# Altium PCB PCB1.PcbDoc (part 1 of 2)
Units mm, origin at the board's own origin, x right, y up, seen from the top; angles counter-clockwise.
Board outline 60.46 x 18.59 mm, 2 copper layers (Top Layer, Bottom Layer), stack 0.325 mm thick; 73 components, 89 nets, 327 pads, 208 vias.
Unrouted connection lines stored in the file: 2.
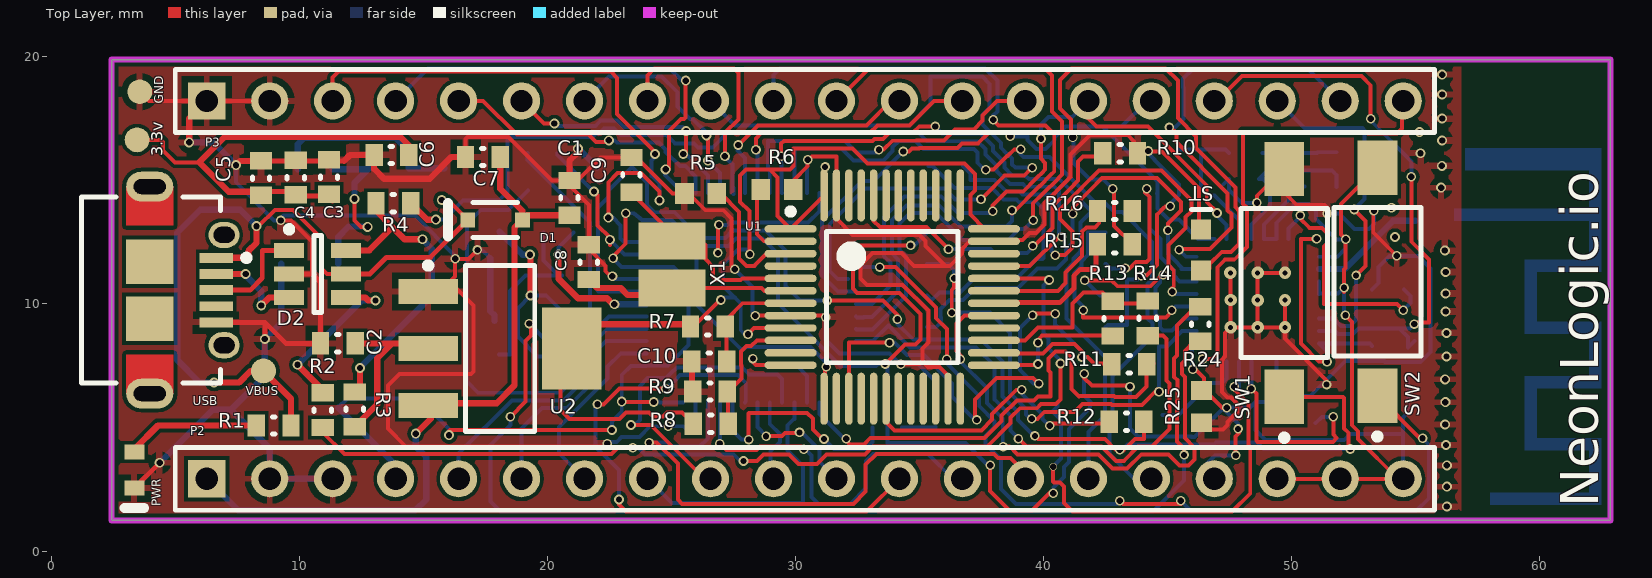
[diagram p0: Top Layer view]
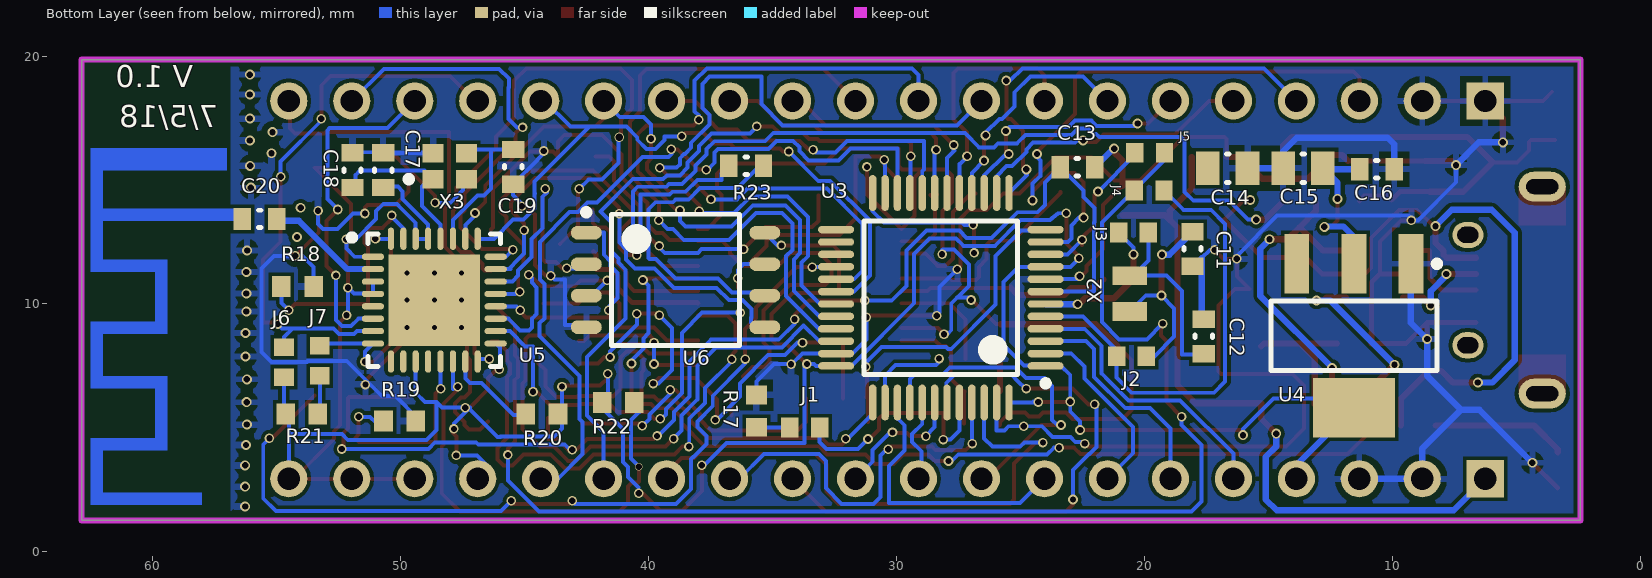
[diagram p1: Bottom Layer view, seen from below]

## Layer stack, top to bottom
Top Solder: solder mask 0.0102, Solder Resist, Dk 3.5
Top Layer: signal copper 0.0356
Dielectric 1: core 0.254, FR-4, Dk 4.2
Bottom Layer: signal copper 0.0356
Bottom Solder: solder mask 0.0102, Solder Resist, Dk 3.5

## Board outline
2.413,1.27 62.87,1.27 62.87,19.86 2.413,19.86

## Design rules (kind name [scope] priority, off if disabled: settings)
Clearance [All] p1: gap=0.152 ignorepadtopadclearanceinfootprint=FALSE
HoleSize [All] p1: absolutevalues=TRUE maxlimit=2.54 minlimit=0.254 maxpercent=80.000 minpercent=20.000
MinimumSolderMaskSliver MinimumSolderMaskSliver_2 [HasFootprint('ESFS-QFN-32_M')] p1: minsoldermaskwidth=0.046
MinimumSolderMaskSliver [HasFootprint('MOLX-47589-0001_V') vs HasFootprint('MOLX-47589-0001_V')] p2: minsoldermaskwidth=0.04
MinimumSolderMaskSliver MinimumSolderMaskSliver_1 [All] p3: minsoldermaskwidth=0.076
PolygonConnect [All] p1: connectstyle=Relief reliefconductorwidth=0.254 reliefentries=4 polygonreliefangle="90 Angle" airgapwidth=0.254
RoomDefinition WiFi [InComponentClass('WiFi')] p1: confinementstyle=ConfineIn formatcopy=TRUE lockcomponents=FALSE outline 0,19.86 62.87,19.86 62.87,1.27 0,1.27
RoomDefinition U_STLINK-V2 [InComponentClass('U_STLINK-V2')] p2: confinementstyle=ConfineIn formatcopy=TRUE lockcomponents=FALSE outline 0,19.86 62.87,19.86 62.87,1.27 0,1.27
RoomDefinition U_MCU [InComponentClass('U_MCU')] p3: confinementstyle=ConfineIn formatcopy=TRUE lockcomponents=FALSE outline 0,19.86 62.87,19.86 62.87,1.27 0,1.27
RoutingVias [All] p1: holewidth=0.254 width=0.4 viastyle="Through Hole" minholewidth=0.254 minwidth=0.385 maxholewidth=0.7 maxwidth=0.9
SilkToSilkClearance [All] p1: silktosilkclearance=0.2
SilkToSolderMaskClearance [IsPad] p1: minsilkscreentomaskgap=0.17 clearancetoexposedcopper=TRUE
SolderMaskExpansion [All] p1: expansion=0.102
UnRoutedNet [InNet('No Net')] p1:
Width [All] p1: maxlimit=0.8 minlimit=0.16 preferedwidth=0.2 minimp=50.000000 maximp=50.000000 favimp=50.000000
25 further rules are at their usual default settings.

## Classes and differential pairs
component class WiFi: C17 C18 C19 C20 J6 J7 R18 R19 R20 R21 R22 R23 U5 U6 X3
component class U_STLINK-V2: 3.3v C1 C2 C3 C4 C5 C6 C7 C8 C9 C10 D1 D2 GND PWR R1 R2 R3 R4 R5 R6 R7 R8 R9 R10 R11 R12 R13 R14 R15 R16 R24 ST U1 U2 USB VBUS X1
component class U_MCU: C11 C12 C13 C14 C15 C16 J1 J2 J3 J4 J5 P2 P3 R17 R25 SW1 SW2 U4 X2

## Components (designator, comment, footprint, x,y, rotation, side; value= is the part's Value field where it differs from the comment)
3.3v "" TP-SM-C-100 3.44,16.62 r0 top
C1 "1uF 16V" CAPC0603(1608)100_L 20.88,14.28 r270 top value=1uF
C2 "1uF 16V" CAPC0603(1608)100_L 11.54,8.41 r0 top value=1uF
C3 "100nF" CAPC0603(1608)100_L 11.18,15.12 r270 top
C4 "100nF" CAPC0603(1608)100_L 9.84,15.1 r270 top
C5 "100nF" CAPC0603(1608)100_L 8.44,15.08 r270 top
C6 "100nF" CAPC0603(1608)100_L 13.7,16.01 r0 top
C7 "100nF" CAPC0603(1608)100_L 17.39,15.93 r0 top
C8 "22pF" CAPC0603(1608)100_L 21.66,11.69 r270 top
C9 "22pF" CAPC0603(1608)100_L 23.38,15.21 r270 top
C10 "100nF" CAPC0603(1608)100_L 26.52,7.68 r0 top
C11 "4.3pF" CAPC0603(1608)100_L 18.06,12.22 r90 bottom
C12 "4.3pF" CAPC0603(1608)100_L 17.6,8.69 r270 bottom
C13 "100nF" CAPC0603(1608)100_L 22.7,15.52 r0 bottom
C14 "10uF 25v" CAPC0805(2012)145_L 16.64,15.48 r0 bottom value=10uF
C15 "10uF 10v" CAPC0805(2012)145_L 13.6,15.48 r180 bottom value=10uF
C16 "100nF" CAPC0603(1608)100_L 10.62,15.44 r0 bottom
C17 "100nF" CAPC0603(1608)100_L 50.7,15.4 r270 bottom
C18 "10pF" CAPC0603(1608)100_L 51.94,15.4 r270 bottom
C19 "10pF" CAPC0603(1608)100_L 45.46,15.53 r90 bottom
C20 "5.6 pf" CAPC0603(1608)100_L 55.69,13.43 r0 bottom value=5.6pF
D1 "PMEG2010 SOD323F" NXP-SOD323F_V 17.88,13.39 r180 top
D2 "USBLC6-2SC6" STM-SOT23-6L_V 10.72,11.21 r0 top
GND "" TP-SM-C-100 3.55,18.56 r0 top
J1 "" RESC1608X55X30LL10T20_A 33.7,5.02 r0 bottom
J2 "" RESC1608X55X30LL10T20_A 20.52,7.89 r0 bottom
J3 "" RESC1608X55X30LL10T20_A 20.44,12.88 r0 bottom
J4 "" RESC1608X55X30LL10T20_A 19.81,14.58 r180 bottom
J5 "" RESC1608X55X30LL10T20_A 19.79,16.1 r0 bottom
J6 "" RESC1608X55X30LL10T20_A 54.71,7.65 r90 bottom
J7 "" RESC1608X55X30LL10T20_A 53.26,7.71 r270 bottom
P2 "Header 20" HDR1X20 6.25,2.95 r0 top locked
P3 "Header 20" HDR1X20 6.25,18.19 r0 top locked
PWR "TLMS1100-GS08" VISH-TLMX1100_V 3.33,3.3 r270 top
R1 "220R 1% 0603(1608)" RESC0603(1608)_L 8.95,5.1 r180 top value="220.00 Ohm"
R2 "22R 1% 0603(1608)" RESC0603(1608)_L 10.93,5.72 r270 top value="22.00 Ohm"
R3 "1K5 1% 0603(1608)" RESC0603(1608)_L 12.22,5.75 r270 top value="1500.00 Ohm"
R4 "22R 1% 0603(1608)" RESC0603(1608)_L 13.78,14.06 r0 top value="22.00 Ohm"
R5 "10K" RESC1609X55X30LL15T15 26.17,14.45 r0 top
R6 "10K" RESC1609X55X30LL15T15 29.25,14.62 r180 top
R7 "100K" RESC0603(1608)_L 26.46,9.09 r0 top value="100000.00 Ohm"
R8 "4K7" RESC0603(1608)_L 26.58,5.17 r0 top value="4700.00 Ohm"
R9 "4K7" RESC0603(1608)_L 26.55,6.47 r180 top value="4700.00 Ohm"
R10 "100K" RESC0603(1608)_L 43.09,16.08 r180 top value="100000.00 Ohm"
R11 "22R" RESC0603(1608)_L 43.46,7.57 r180 top value="22.00 Ohm"
R12 "22R" RESC0603(1608)_L 43.35,5.25 r0 top value="22.00 Ohm"
R13 "100R" RESC0603(1608)_L 42.79,9.41 r90 top value="100.00 Ohm"
R14 "22R" RESC0603(1608)_L 44.203,9.422 r270 top value="22.00 Ohm"
R15 "100K" RESC0603(1608)_L 42.88,12.41 r180 top value="100000.00 Ohm"
R16 "22R" RESC0603(1608)_L 42.88,13.75 r180 top value="22.00 Ohm"
R17 "10K" RESC1609X55X30LL15T15 35.65,5.68 r90 bottom
R18 "12K" RESC1609X55X30LL15T15 54.16,10.71 r0 bottom
R19 "12K" RESC1609X55X30LL15T15 50.04,5.28 r0 bottom
R20 "12K" RESC1609X55X30LL15T15 44.3,5.56 r0 bottom
R21 "12K" RESC1609X55X30LL15T15 53.99,5.56 r0 bottom
R22 "12K" RESC1609X55X30LL15T15 41.22,6.02 r180 bottom
R23 "200R" RESC0603(1608)_L 36.06,15.57 r0 bottom value="200.00 Ohm"
R24 "100R" RESC0603(1608)_L 46.33,9.19 r270 top value="100.00 Ohm"
R25 "10K" RESC1609X55X30LL15T15 46.37,5.86 r90 top
ST "" ROHM-SMLE12BC7TT86_V 46.36,12.18 r90 top
SW1 "FSMSMTR" TECO-FSMSMTR_V 49.71,10.85 r90 top
SW2 "FSMSMTR" TECO-FSMSMTR_V 53.47,10.9 r90 top
U1 "STM32F103C8T6" LQFP48_M 33.9,10.28 r0 top
U2 "LD1117S33CTR" SOT-223_N 18.08,8.2 r0 top
U3 "STM32F070CBT6" STM-LQFP48_N 28.21,10.25 r0 bottom
U4 "LD1117S33CTR" SOT-223_N 11.55,8.72 r270 bottom
U5 "ESP8266EX" ESFS-QFN-32_M 48.64,10.155 r180 bottom
U6 "S25FL116K0XMFI011" CYP-SOC-8_L 38.91,10.97 r180 bottom
USB "47589-0001" MOLX-47589-0001_V 5.45,10.56 r270 top locked
VBUS "" TP-SM-C-100 8.54,7.3 r90 top
X1 "8MHZ" NDK-NX3225GD-8MHZ-STD-CRA-3_V 25.01,11.59 r90 top
X2 "ABS06-32.768KHZ-T" ABRA-ABS06-2_V 20.59,10.42 r90 bottom
X3 "26MHZ" NDK-NX2016SA-26MHZ-EXS00A-CS06025-4_V 48.02,15.56 r180 bottom

## Footprints (in the part's own frame and the unit in brackets; to place one, negate y for a bottom-side part, rotate by r counter-clockwise, add the part's x,y. Pads: shape width x height; smd on the part's side, far side on the other; paste and mask are expansions set on the pad)
ABRA-ABS06-2_V [mm] "SMD, 2-Leads, Body 2x1.2mm"
  rect 0.75x1.4 smd: 1(-0.725,0) 2(0.725,0)
  body extent -1,-0.6 1,0.6, height 0.6
CAPC0603(1608)100_L [mm] "Chip Capacitor, Body 1.6x0.8mm, Height 1.0mm, IPC High Density"
  rect 0.7x0.9 smd: 1(-0.7,0) 2(0.7,0)
  silkscreen extent -0.05,-0.35 0.05,0.35, body extent -0.87,-0.47 0.88,0.48, height 1
CAPC0805(2012)145_L [mm] "Chip Capacitor, Body 2.0x1.2mm, Height 1.45mm, IPC High Density"
  rect 0.95x1.35 smd: 1(-0.8,0) 2(0.8,0)
  silkscreen extent -0.05,-0.57 0.05,0.57, body extent -1.1,-0.72 1.1,0.72, height 1.45
CYP-SOC-8_L [mm] "SOIC, 8-Leads, Body 5.3x5.3mm, Pitch 1.27mm, IPC High Density"
  oval 1.25x0.55 smd: 1(-3.6,1.905) 2(-3.6,0.635) 3(-3.6,-0.635) 4(-3.6,-1.905) 5(3.6,-1.905) 6(3.6,-0.635) 7(3.6,0.635) 8(3.6,1.905)
  silkscreen extent -3.73,-2.65 2.57,2.85, body extent -4,-2.65 4,2.65, height 2.16
ESFS-QFN-32_M [mm] "QFN, 32-Leads, Body 5.05x5.05mm, Pitch 0.50mm, Thermal Pad 3.70x3.70mm, IPC Low Density"
  oval 0.9x0.25 smd: 1(-2.475,1.75) 2(-2.475,1.25) 3(-2.475,0.75) 4(-2.475,0.25) 5(-2.475,-0.25) 6(-2.475,-0.75) 7(-2.475,-1.25) 8(-2.475,-1.75) 17(2.475,-1.75) 18(2.475,-1.25) 19(2.475,-0.75) 20(2.475,-0.25) 21(2.475,0.25) 22(2.475,0.75) 23(2.475,1.25) 24(2.475,1.75)
  oval 0.25x0.9 smd: 9(-1.75,-2.475) 10(-1.25,-2.475) 11(-0.75,-2.475) 12(-0.25,-2.475) 13(0.25,-2.475) 14(0.75,-2.475) 15(1.25,-2.475) 16(1.75,-2.475) 25(1.75,2.475) 26(1.25,2.475) 27(0.75,2.475) 28(0.25,2.475) 29(-0.25,2.475) 30(-0.75,2.475) 31(-1.25,2.475) 32(-1.75,2.475)
  rect 3.7x3.7 smd: 33(0,0)
  silkscreen extent -3.45,-2.68 2.67,2.67, body extent -2.52,-2.52 2.53,2.53, height 0.9
HDR1X20 [mm] "Connector; Header; 20 Position"
  rect 1.5x1.5 hole 0.9: 1(0,0)
  round 1.5 hole 0.9: 2(2.54,0) 3(5.08,0) 4(7.62,0) 5(10.16,0) 6(12.7,0) 7(15.24,0) 8(17.78,0) 9(20.32,0) 10(22.86,0) 11(25.4,0) 12(27.94,0) 13(30.48,0) 14(33.02,0) 15(35.56,0) 16(38.1,0) 17(40.64,0) 18(43.18,0) 19(45.72,0) 20(48.26,0)
  silkscreen extent -1.27,-1.27 49.53,1.27
LQFP48_M [mm] "Thin QFP, 48-Leads, Body 7x7mm, Pitch 0.5mm, IPC Low Density"
  oval 2.1x0.3 smd: 1(-4.1,2.75) 2(-4.1,2.25) 3(-4.1,1.75) 4(-4.1,1.25) 5(-4.1,0.75) 6(-4.1,0.25) 7(-4.1,-0.25) 8(-4.1,-0.75) 9(-4.1,-1.25) 10(-4.1,-1.75) 11(-4.1,-2.25) 12(-4.1,-2.75) 25(4.1,-2.75) 26(4.1,-2.25) 27(4.1,-1.75) 28(4.1,-1.25) 29(4.1,-0.75) 30(4.1,-0.25) 31(4.1,0.25) 32(4.1,0.75) 33(4.1,1.25) 34(4.1,1.75) 35(4.1,2.25) 36(4.1,2.75)
  oval 0.3x2.1 smd: 13(-2.75,-4.1) 14(-2.25,-4.1) 15(-1.75,-4.1) 16(-1.25,-4.1) 17(-0.75,-4.1) 18(-0.25,-4.1) 19(0.25,-4.1) 20(0.75,-4.1) 21(1.25,-4.1) 22(1.75,-4.1) 23(2.25,-4.1) 24(2.75,-4.1) 37(2.75,4.1) 38(2.25,4.1) 39(1.75,4.1) 40(1.25,4.1) 41(0.75,4.1) 42(0.25,4.1) 43(-0.25,4.1) 44(-0.75,4.1) 45(-1.25,4.1) 46(-1.75,4.1) 47(-2.25,4.1) 48(-2.75,4.1)
  silkscreen extent -4.22,-2.65 2.65,3.57, body extent -3.5,-3.5 3.5,3.5, height 1.6
MOLX-47589-0001_V [mm] "SMD, 5-Leads, Body 7.5x5.6mm, Pitch 0.65mm"
  rect 0.4x1.35 smd: 1(-1.3,1.175) 2(-0.65,1.175) 3(0,1.175) 4(0.65,1.175) 5(1.3,1.175)
  oval 1.05x1.25 hole 0.65 slot 0.85 at 90 deg: 6(-2.225,1.5) 7(2.225,1.5)
  oval 1.2x1.9 hole 0.6 slot 1.3 at 90 deg: 8(-4.175,-1.5) 11(4.175,-1.5)
  rect 1.8x1.9 smd: 9(-1.15,-1.5) 10(1.15,-1.5)
  Top Layer region: -2.6,-0.55 -4.175,-0.55 -4.175,-2.45 -2.6,-2.45
  Top Layer region: 2.6,-2.45 4.175,-2.45 4.175,-0.55 2.6,-0.55
  silkscreen extent -3.75,-4.25 3.75,2.53, body extent -4.32,-4.25 4.32,1.64, height 2.74
NDK-NX2016SA-26MHZ-EXS00A-CS06025-4_V [mm] "Hand Drawn, 4-Leads, Body 2x1.6mm"
  rect 0.85x0.75 smd: 1(-0.675,-0.525) 2(0.675,-0.525) 3(0.675,0.525) 4(-0.675,0.525)
  silkscreen extent -1.78,-0.65 -1.53,-0.4, body extent -1,-0.8 1,0.8, height 0.5
NDK-NX3225GD-8MHZ-STD-CRA-3_V [mm] "SMD, 2-Leads, Body 3.2x2.5mm"
  rect 1.5x2.7 smd: 1(-0.95,0) 2(0.95,0)
  body extent -1.6,-1.25 1.6,1.25, height 1
NXP-SOD323F_V [mm] "SODFL, 2-Leads, Body 1.8x1.35mm"
  rect 0.6x0.6 smd paste-0.05: 1(-1.1,0) 2(1.1,0)
  silkscreen extent -0.9,-0.7 1.9,0.7, body extent -1.25,-0.67 1.25,0.67, height 0.8
RESC0603(1608)_L [mm] "Chip Resistor, Body 1.6x0.8mm, IPC High Density"
  rect 0.7x0.9 smd: 1(-0.7,0) 2(0.7,0)
  silkscreen extent -0.05,-0.35 0.05,0.35, body extent -0.85,-0.47 0.85,0.47, height 0.6
RESC1608X55X30LL10T20_A [mm] "Chip Resistor, 2-Leads, Body 1.7x0.9mm, IPC High Density"
  rect 0.7x0.8 smd: 1(-0.6,0) 2(0.6,0)
  body extent -0.85,-0.45 0.85,0.45, height 0.55
RESC1609X55X30LL15T15 [mm] "Chip Resistor, 2-Leads, Body 1.75x0.95mm, IPC High Density"
  rect 0.75x0.85 smd: 1(-0.65,0) 2(0.65,0)
  body extent -0.87,-0.48 0.87,0.48, height 0.55
ROHM-SMLE12BC7TT86_V [mm] "SMD, 2-Leads, Body 1.6x0.8mm"
  rect 0.8x0.8 smd: 1(-0.825,0) 2(0.825,0)
  silkscreen extent 1.63,-0.4 1.63,0.4, body extent -0.8,-0.4 0.8,0.4, height 0.4
SOT-223_N [mm] "SOT223, 4-Leads, Body 6.5x3.5mm, Pitch 2.3mm, Lead Span 7mm, IPC Medium Density"
  rect 2.4x1 smd: 1(-2.9,2.3) 2(-2.9,0) 3(-2.9,-2.3)
  rect 2.4x3.3 smd: 4(2.9,0)
  silkscreen extent -3.02,-3.35 1.4,3.47, body extent -1.85,-3.35 1.85,3.35, height 1.8
STM-LQFP48_N [mm] "QFP, 48-Leads, Body 7x7mm, Pitch 0.5mm, IPC Medium Density"
  oval 1.45x0.3 smd: 1(-4.225,2.75) 2(-4.225,2.25) 3(-4.225,1.75) 4(-4.225,1.25) 5(-4.225,0.75) 6(-4.225,0.25) 7(-4.225,-0.25) 8(-4.225,-0.75) 9(-4.225,-1.25) 10(-4.225,-1.75) 11(-4.225,-2.25) 12(-4.225,-2.75) 25(4.225,-2.75) 26(4.225,-2.25) 27(4.225,-1.75) 28(4.225,-1.25) 29(4.225,-0.75) 30(4.225,-0.25) 31(4.225,0.25) 32(4.225,0.75) 33(4.225,1.25) 34(4.225,1.75) 35(4.225,2.25) 36(4.225,2.75)
  oval 0.3x1.45 smd: 13(-2.75,-4.225) 14(-2.25,-4.225) 15(-1.75,-4.225) 16(-1.25,-4.225) 17(-0.75,-4.225) 18(-0.25,-4.225) 19(0.25,-4.225) 20(0.75,-4.225) 21(1.25,-4.225) 22(1.75,-4.225) 23(2.25,-4.225) 24(2.75,-4.225) 37(2.75,4.225) 38(2.25,4.225) 39(1.75,4.225) 40(1.25,4.225) 41(0.75,4.225) 42(0.25,4.225) 43(-0.25,4.225) 44(-0.75,4.225) 45(-1.25,4.225) 46(-1.75,4.225) 47(-2.25,4.225) 48(-2.75,4.225)
  silkscreen extent -4.35,-3.1 3.1,3.57, body extent -3.5,-3.5 3.5,3.5, height 1.6
STM-SOT23-6L_V [mm] "SOT23, 6-Leads, Body 3.05x1.75mm, Pitch 0.95mm"
  rect 1.2x0.6 smd: 1(-1.15,0.95) 2(-1.15,0) 3(-1.15,-0.95) 4(1.15,-0.95) 5(1.15,0) 6(1.15,0.95)
  silkscreen extent -1.27,-1.55 0.15,1.92, body extent -1.6,-1.53 1.6,1.53, height 1.45
TECO-FSMSMTR_V [mm] "SMD, 2-Leads, Body 6x3.5mm, Pitch 9.19mm"
  rect 2.2x1.6 smd: 1(-4.595,0)
  rect 2.18x1.6 smd: 2(4.595,0)
  silkscreen extent -6.37,-1.75 3,1.75, body extent -4.98,-1.75 4.98,1.75, height 4.4
TP-SM-C-100 [mm] "Test Point, Surface Mounting, Circular, Pad Diameter 1mm"
  round 1 smd: 1(0,0)
VISH-TLMX1100_V [mm] "SMD, 2-Leads, Body 1.6x0.8mm"
  rect 0.6x0.8 smd: 1(-0.725,0) 2(0.725,0)
  silkscreen extent 1.52,-0.4 1.52,0.4, body extent -0.8,-0.4 0.8,0.4, height 0.65

## Part data
3.3v GND VBUS: library part CMP-0484-00002-2, "Test Point, Surface Mount, Circular, Pad Diameter 1 mm", Manufacturer="No Vendor", PartNumber=TP-SM-C-100
C1 C2: library part CMP-1035-02736-1, "CAP 1uF 16V ±5% 0603 (1608 Metric) Thickness 1mm SMD", Case-EIA=0603, Case-Metric=1608, Rated Voltage="16 V", Tolerance=±5%, Max Thickness="1 mm", Technology=SMT
C3 C4 C5 C6 C7 C10 C13 C16 C17: library part CMP-1035-02583-1, "CAP 100nF 16V ±5% 0603 (1608 Metric) Thickness 1mm SMD", Case-EIA=0603, Case-Metric=1608, Rated Voltage="16 V", Tolerance=±5%, Max Thickness="1 mm", Technology=SMT
C8 C9: library part CMP-1035-00815-1, "CAP 22pF 25V ±10% 0603 (1608 Metric) Thickness 1mm SMD", Case-EIA=0603, Case-Metric=1608, Rated Voltage="25 V", Tolerance=±10%, Max Thickness="1 mm", Technology=SMT
C11 C12: library part CMP-1035-00303-1, "CAP 4.3pF 25V ±0.5pF 0603 (1608 Metric) Thickness 1mm SMD", Case-EIA=0603, Case-Metric=1608, Rated Voltage="25 V", Tolerance=±0.5pF, Max Thickness="1 mm", Technology=SMT
C14: library part CMP-1036-04932-1, "CAP 10uF 25V ±10% 0805 (2012 Metric) Thickness 1.45mm SMD", Case-EIA=0805, Case-Metric=2012, Rated Voltage="25 V", Tolerance=±10%, Max Thickness="1.45 mm", Technology=SMT
C15: library part CMP-1036-04926-1, "CAP 10uF 10V -20% to +80% 0805 (2012 Metric) Thickness 1.45mm SMD", Case-EIA=0805, Case-Metric=2012, Rated Voltage="10 V", Tolerance="-20% to +80%", Max Thickness="1.45 mm", Technology=SMT
C18 C19: library part CMP-1035-00542-1, "CAP 10pF 16V ±1% 0603 (1608 Metric) Thickness 1mm SMD", Case-EIA=0603, Case-Metric=1608, Rated Voltage="16 V", Tolerance=±1%, Max Thickness="1 mm", Technology=SMT
C20: library part CMP-1035-00372-1, "CAP 5.6pF 25V ±0.1pF 0603 (1608 Metric) Thickness 1mm SMD", Case-EIA=0603, Case-Metric=1608, Rated Voltage="25 V", Tolerance=±0.1pF, Max Thickness="1 mm", Technology=SMT
D1: library part CMP-2000-06909-1, "Very Low Forward Voltage MEGA Schottky Barrier Rectifier, 1 A, 660 mV, -65 to 150 degC, 2-Pin SOD323F, RoHS, Tape and Reel", Capacitance @ Vr, F=68pF@1V,1MHz, Current - Average Rectified (Io)=1A(DC), Current - Reverse Leakage @ Vr=50µA@60V, Manufacturer=NXP, Operating Temperature - Junction=150°C(Max), Package / Case=SC-90,SOD-323F, Package Description="2-Pin Small Outline Diode Flat Lead, Body 1.7 x 1.35 mm", Package Reference=SOD323F, Package Version=02/2016, Standard Package=1, Supplier Device Package=SOD-323F, Voltage - DC Reverse (Vr) (Max)=60V, Voltage - Forward (Vf) (Max) @ If=660mV@1A, Category=DiscreteSemiconductorProducts, Datasheet URL=https://datasheet.ciiva.com/913/pmeg6010ceh-pmeg6010cej-913504.pdf, Datasheet Version="Rev. 02, 03/2007", Diode Type=Schottky, Family=Diodes,Rectifiers-Single, Kits=NXPMEGA1-KIT-ND-KITSCHOTTKYDIODE17VALUES, Manufacturer URL=http://www.nxp.com/, Mounting Technology=SurfaceMount, Mounting Type=SurfaceMount, Online Catalog=SchottkyDiode, Other Names=568-4138-1, Package URL=http://www.nxp.com/documents/outline_drawing/SOD323F.pdf, Packaging=CutTape(CT), PCN Design/Specification=ResinHardener02/Jul/2013BondWiringChg06/Sep/2015BondingWireRevision28/Sep/2015SOD323FBondWireAutoCu&2ndSourceMoldComp2/Nov/2015, PCN Packaging=LighterReels02/Jan/2014, Reverse Recovery Time (trr)=-, Series=-, Speed=FastRecovery=200mA(Io)
D2: library part CMP-2000-05378-1, "Very low capacitance ESD protection, 3.5 pF, -40 to 125 degC, 6-Pin SOT23, RoHS, Tape and Reel", Capacitance Value=3.5pF, Clamping Voltage=17V, Leakage Current=0.15uA, Manufacturer=STMicroelectronics, Operating Temperature Classification=Automotive, Operating Temperature Max Deg. C=125C, Operating Temperature Min Deg. C=-40C, Operating Temp Range=-40Cto125C, Package / Case=SOT-23, Package Description="6-Pin Small Outline Transistor, Body 2.925 x 1.625 mm, Pitch 0.95 mm", Package Reference=SOT23-6L, Peak Pulse Current=5A, Reverse Breakdown Voltage=6V, Reverse Stand-off Voltage=5V, Test Current (It)=1mA, Clamping Voltage (Max)=17V, Configuration=Dual, Datasheet URL=http://www.st.com/st-web-ui/static/active/en/resource/technical/document/datasheet/CD00050750.pdf, Datasheet Version="Rev. 5, 10/2011", Direction Type=Uni-Directional, Leakage Current (Max)=0.15uA, Manufacturer URL=http://www.st.com/, Mounting=SurfaceMount, Mounting Style=SurfaceMount, Number of Elements=1, Packaging=TapeandReel, Pin Count=6, Polarity=Uni-Directional, Product Depth (mm)=1.75mm, Product Height (mm)=1.3mm, Product Length (mm)=3.05mm, Rad Hardened=No, Suppressor Type=DiodeArrays, Working Voltage=5V, Working Voltage (Max)=5V
J1 J2 J3 J4 J5 J6 J7: library part CMP-2000-06686-1, "Chip Resistor, 0 Ohm, +/- 5%, 100 mW, -55 to 155 degC, 0603 (1608 Metric), RoHS, Tape and Reel", Manufacturer=Rohm, Operating Temperature=-55°C~155°C, Package / Case=0603(1608Metric), Package Description="2-Pin Surface Mount Device, Body 1.60 x 0.80 mm", Package Reference=0603, Power (Watts)=0.1W,1/10W, Resistance (Ohms)=0.0, Standard Package=5,000, Temperature Coefficient=-, Tolerance=Jumper, Category=Resistors, Composition=ThickFilm, Datasheet URL=http://www.rohm.com/web/global/datasheet/MCR03ERTJ, Datasheet Version="Rev. F, 02/2015", EDA / CAD Models=DownloadfromAcceleratedDesigns, Family=ChipResistor-SurfaceMount, Features=-, Height="0.022\"(0.55mm)", Manufacturer URL=http://www.rohm.com/web/global/, Mounting Technology=SurfaceMount, Number of Terminations=2, Online Catalog=MCR03Series, Other Names=RHM0.0CGTR, Packaging=Tape&Reel(TR), Series=MCR, Size / Dimension="0.063\"Lx0.031\"W(1.60mmx0.80mm)", Supplier Device Package=0603(1608Metric)
P2 P3: "Header, 20-Pin", LatestRevisionDate=17-Jul-2002, LatestRevisionNote="Re-released for DXP Platform.", Publisher="Altium Limited"
PWR: library part CMP-1666-00027-1, "LED, RED, 2.1 V, -40 to 100 degC, 2-Pin SMD (0603), RoHS, Tape and Reel", Capacitance="12 pF", Case/Package=0603, Case Code (Metric)=1608, Max Operating Temperature=125degC, Min Operating Temperature=-55degC, Package Quantity=4000, Resistance="100000000000 Ohm", Tolerance=5%, Type (Capacitors)=C0G, Voltage Rating="50 V", Case Code (Imperial)=0603, ComponentLink1Description="Manufacturer URL", ComponentLink1URL=http://www.vishay.com/, ComponentLink2Description=Datasheet, ComponentLink2URL=http://www.vishay.com/docs/83173/tlmb1100.pdf, DatasheetVersion="Rev. 2.7, 03/2016", Height="0.8 mm", Length="1.6 mm", Mount="Surface Mount", PackageDescription="2-Pin Surface Mount Device, Body 1.6 x 0.8 mm", PackageReference=TLMX1100, Packaging="Tape and Reel", Pins=2, Radiation Hardening=No, REACH SVHC="No SVHC", RoHSCompliant=True, Voltage Rating (DC)="50 V", Width="0.8 mm"
R1: library part CMP-1012-00433-1, "220R 0.1W 1% 0603 (1608 Metric)  SMD", Case-EIA=0603, Case-Metric=1608, Power="0.1 W", Tolerance="1 %", Technology=SMT
R2 R4 R11 R12 R14 R16: library part CMP-1012-00320-1, "22R 0.1W 1% 0603 (1608 Metric)  SMD", Case-EIA=0603, Case-Metric=1608, Power="0.1 W", Tolerance="1 %", Technology=SMT
R3: library part CMP-1012-00528-1, "1K5 0.1W 1% 0603 (1608 Metric)  SMD", Case-EIA=0603, Case-Metric=1608, Power="0.1 W", Tolerance="1 %", Technology=SMT
R5 R6 R17 R25: library part CMP-2000-07452-1, "Chip Resistor, 10 KOhm, +/- 1%, 0.1 W, -55 to 155 degC, 0603 (1608 Metric), RoHS, Tape and Reel", Case\/Package=0603, Case Code (Metric)=1608, Manufacturer=Panasonic, Max Operating Temperature=155degC, Max Power Dissipation=100mW, Min Operating Temperature=-55degC, Package Description="2-Pin Surface Mount Device, Body 1.6 x 0.85 mm", Package Quantity=1, Package Reference=603, Resistance=10KOhm, Temperature Coefficient=100ppm\/degreesC, Tolerance=1%, Voltage Rating=75V, Case Code (Imperial)=0603, Composition=ThickFilm, Contact Plating=Tin, Datasheet URL=https://industrial.panasonic.com/cdbs/www-data/pdf/RDA0000/AOA0000C304.pdf, Datasheet Version=02/2017, Depth=0.8mm, Height=0.45mm, Lead Free=LeadFree, Length=1.6mm, Manufacturer URL=http://www.panasonic.com/, Military Standard=Not, Mount=SurfaceMount, Mounting Technology=SurfaceMount, Number of Pins=2, Number of Terminations=2, Packaging=TapeandReel, Power Rating=100mW, Radiation Hardening=No, REACH SVHC=NoSVHC, RoHSCompliant=true, Termination=SMD/SMT, Voltage Rating (DC)=75V, Width=0.031inch
R7 R10 R15: library part CMP-1012-00736-1, "100K 0.1W 1% 0603 (1608 Metric)  SMD", Case-EIA=0603, Case-Metric=1608, Power="0.1 W", Tolerance="1 %", Technology=SMT
R8 R9: library part CMP-1012-00586-1, "4K7 0.1W 1% 0603 (1608 Metric)  SMD", Case-EIA=0603, Case-Metric=1608, Power="0.1 W", Tolerance="1 %", Technology=SMT
R13 R24: library part CMP-1012-00397-1, "100R 0.1W 1% 0603 (1608 Metric)  SMD", Case-EIA=0603, Case-Metric=1608, Power="0.1 W", Tolerance="1 %", Technology=SMT
R18 R19 R20 R21 R22: library part CMP-2100-03631-1, "Chip Resistor, 12 KOhm, +/- 1%, 0.1 W, -55 to 155 degC, 0603 (1608 Metric), RoHS, Tape and Reel", Case/Package=0603, Case Code (Metric)=1608, Manufacturer=Panasonic, Max Operating Temperature=155degC, Max Power Dissipation=100mW, Min Operating Temperature=-55degC, Package Description="2-Pin Surface Mount Device, Body 1.6 x 0.85 mm", Package Quantity=1, Resistance=12KOhm, Temperature Coefficient=100ppm/degreesC, Tolerance=1%, Voltage Rating=75V, Case Code (Imperial)=0603, Composition=ThickFilm, Contact Plating=Tin, Datasheet URL=https://industrial.panasonic.com/cdbs/www-data/pdf/RDA0000/AOA0000C283.pdf, Datasheet Version=42095.0, Depth=0.8mm, Height=0.022inch, Lead Free=LeadFree, Length=1.6mm, Manufacturer URL=http://www.panasonic.com/, Military Standard=Not, Mount=SurfaceMount, Number of Pins=2, Number of Terminations=2, Package Reference=0603, Package URL=http://www.st.com/st-web-ui/static/active/en/resource/technical/document/datasheet/CD00001320.pdf, Packaging=TapeandReel, Power Rating=100mW, Radiation Hardening=No, REACH SVHC=NoSVHC, RoHSCompliant=true, Termination=SMD/SMT, Voltage Rating (DC)=75V, Weight=7.1E-05oz, Width=0.031inch
R23: library part CMP-1012-00429-1, "200R 0.1W 1% 0603 (1608 Metric)  SMD", Case-EIA=0603, Case-Metric=1608, Power="0.1 W", Tolerance="1 %", Technology=SMT
ST: library part CMP-2000-07118-1, "Blue LED, 2.9 V, 20 mA, -30 to 85 degC, 2-Pin SMD, RoHS, Tape and Reel", Color=Blue, Forward (Drive) Current=20mA, Forward Voltage=2.9V, Manufacturer=Rohm, Package Description="2-Pin Surface Mount Device, Body 1.6 x 0.8 mm", Package Reference=1608, Datasheet URL=https://datasheet.ciiva.com/11773/0900766b80df3ad8-11773825.pdf, Datasheet Version="Rev. 2.0, 03/2010", Dimension=1.6x0.8x0.36mm, Intensity=22mcd, Lens Type=Clear, Manufacturer URL=http://www.rohm.com/web/global/, Mounting Technology=SurfaceMount, Viewing Angle=140°
SW1 SW2: library part CMP-2000-07501-1, "FSMSM Push Button Switch, 50 mA, -35 to 85 degC, 2-Pin SMD, RoHS, Tape and Reel", Case\/Package=SMD/SMT, Contact Current Rating=50mA, Contact Resistance=100mOhm, Manufacturer="TE Connectivity", Max Operating Temperature=85degC, Max Voltage Rating (DC)=12V, Min Operating Temperature=-35degC, Operating Force=180gf, Package Description="2-Pin Surface Mount Device, Body 6 x 3.5 mm, Pitch 9.19 mm", Package Quantity=1800, Voltage Rating (DC)=24V, Actuator Length=1.07mm, Actuator Material=Polyamide, Contact Material=Brass, Contact Plating=Silver, Current Rating=50mA, Datasheet URL=http://www.te.com/commerce/DocumentDelivery/DDEController?Action=showdoc&DocId=Customer+Drawing%7F1437566-3%7FC2%7Fpdf%7FEnglish%7FENG_CD_1437566-3_C2_1437566_3_1_c.dwg.pdf%7F1437566-4, Datasheet Version="Rev. C2, 08/2014", Electrical Life=20000Cycles, ELV=Compliant, Illumination Type=Illuminated, Lead Free=LeadFree, Manufacturer URL=http://www.te.com/, Mechanical Life=20000Cycles, Mount=SurfaceMount, Mounting Technology=SurfaceMount, Orientation=Straight, Package Reference=FSMSMTR, Packaging=TapeandReel, REACH SVHC=Unknown, RoHSCompliant=true, Switch Travel=0.25mm, Termination=GullWing, Throw Configuration=SPST
U1: library part CMP-0237-00215-1, "STM32 ARM-based 32-bit MCU Performance Line with 64 kB Flash, 20 kB Internal RAM, -40 to +85°C Temperature, 48-Pin LQFP, Tray", ComponentLink1Description="STM32F103 Datasheet", ComponentLink1URL=http://www.st.com/internet/com/TECHNICAL_RESOURCES/TECHNICAL_LITERATURE/DATASHEET/CD00161566.pdf, ComponentLink2Description="STM32 Family Web Page", ComponentLink2URL=www.st.com/stm32, ComponentLink3Description="st.com Home", ComponentLink3URL=http://www.st.com/internet/com/home/home.jsp, DatasheetVersion="rev13.0, Apr-2011", PackageDescription="48-Pin Low-Profile Quad Flat Pack, 7 x 7 mm Body, 0.5 mm Pitch (LQFP48)", PackageReference=LQFP48, PackageVersion="rev13, Apr-2011", PartId=1
U2 U4: library part CMP-0244-00307-1, "Fixed Low Drop Positive Voltage Regulator, 3.3V, 4-Pin SOT-223, Tape and Reel", ComponentLink1Description="Manufacturer URL", ComponentLink1URL=http://www.st.com, ComponentLink2Description=Datasheet, ComponentLink2URL=http://www.st.com/internet/com/TECHNICAL_RESOURCES/TECHNICAL_LITERATURE/DATASHEET/CD00000544.pdf, DatasheetVersion=1/11/2011, PackageDescription="4-Pin SOT-223 Package, 6.5 x 3.5 mm Body, 2.3 mm Pitch, 7 mm Lead Span", PackageReference=SOT-223, PackageVersion=2010
U3: library part CMP-0304-00143-1, "ARM Cortex-M0 32-bit MCU, 128 KB Flash, 16 KB Internal RAM, 37 I/Os, 48-Pin LQFP, -40 to 85 degC, Tray", I/Os (High Current)=37, Operating Frequency(F) (Processor speed) (MHz)=48, Package Description="48-Pin Low Profile Quad Flat Package, Body 7 x 7 mm, Pitch 0.5 mm", Package Reference=LQFP48, Supply Voltage(Vcc) min (V)=2.4, ComponentLink1Description="Manufacturer URL", ComponentLink1URL=http://www.st.com/, ComponentLink2Description=Datasheet, ComponentLink2URL=http://www.st.com/st-web-ui/static/active/en/resource/technical/document/datasheet/DM00141386.pdf, Core="ARM Cortex-M0", DatasheetVersion="Rev. 3", FLASH Size (Prog) (kB)=128, Internal RAM Size (kB)=16, Mounting Technology="Surface Mount", Packing=Tray
U5: library part CMP-2000-07453-1, "Low-Power, Highly-Integrated Wi-Fi Solution, 2.5 to 3.6 V, 80 mA, -40 to 125 degC, 32-Pin QFN", Manufacturer="Espressif Systems", Package Description="32-Pin Quad Falt No-Lead, Body 5 x 5 mm, Pitch 0.5 mm", Package Reference=QFN-32, Datasheet URL=http://espressif.com/sites/default/files/documentation/0a-esp8266ex_datasheet_en.pdf, Datasheet Version="Rev. 5.4, 04/2017", Manufacturer URL=http://espressif.com, Mounting Technology=SurfaceMount
U6: library part CMP-2000-07015-1, "SPI Flash Memory, 16 Mbit, 2.7 to 3.6 V, -40 to 85 degC, 8-Pin SOIC, RoHS, Tube", Manufacturer=CypressSemiconductorCorp, Operating Temperature=-40°C~85°C(TA), Package / Case="8-SOIC(0.209\",5.30mmWidth)", Package Description="8-Pin Small Outline Integrated Circuit, Body 5.283 x 5.283 mm, Pitch 1.27 mm", Package Reference=SOIC-8, Supplier Device Package=8-SO, Voltage - Supply=2.7V~3.6V, Category=IntegratedCircuits(ICs), Datasheet URL=http://www.cypress.com/file/196886/download, Datasheet Version="Rev. *E, 06/2016", Family=Memory, Format - Memory=FLASH, Interface=SPISerial, Manufacturer URL=http://www.cypress.com/, Memory Size=16M(2Mx8), Memory Type=FLASH-NOR, Mounting Technology=SurfaceMount, Packaging=Tube, Series=FL1-K, Speed=108MHz
USB: library part CMP-2000-05610-1, "Right Angle Female Type AB Micro USB Connector, 30 V, 1.8 A, -30 to 85 degC, RoHS, Tape and Reel", Color=Black, Current Rating=1.8A, Manufacturer=Molex, Operating Temperature Range=-20Cto+85C, Package Description="Micro USB Connector, Pitch 0.65 mm, 5 Positions, Body 7.5 x 5.6 mm", Voltage Rating=30VAC, =0475890001, Brand=Molex, Connector Type=MicroUSBTypeABreceptacle, Contact Material=CopperAlloy, Contact Plating=Gold, Datasheet URL=http://www.molex.com/webdocs/datasheets/pdf/en-us/0475890001_IO_CONNECTORS.pdf, Datasheet Version=12/2016, Gender=Female, Manufacturer URL=http://www.molex.com/, Mounting Angle=Right, Mounting Technology=SurfaceMount, Number of Contacts=5Contact, Number of Ports=1Port, Package Reference=47589-0001, Package URL=http://www.molex.com/pdm_docs/sd/475890001_sd.pdf, Packaging=Reel, Product=MicroUSBTypeABConnectors, Product Category=USBConnectors, RoHS=True, Series=47589, Standard=USB, Termination Style=SMD/SMT
X1: library part CMP-2000-07595-1, "Crystal Unit, 8 MHz, 8 pF, -40 to 150 degC, 2-Pin SMD, RoHS, Tape and Reel", Case/Package=SMD/SMT, ESR (Equivalent Series Resistance)=500Ohm, Frequency=8MHz, Frequency Stability=150ppm, Frequency Tolerance=50ppm, Load Capacitance=8pF, Manufacturer=NDK, Max Operating Temperature=150degC, Min Operating Temperature=-40degC, Package Description="2-Pin Surface Mount Device, Body 3.2 x 2.5 mm", Package Quantity=3000, Package Reference=NX3225GD-8MHZ-STD-CRA-3, Datasheet URL=http://www.ndk.com/images/products/catalog/c_NX3225GD-STD-CRA-3_e.pdf, Datasheet Version=11/2016, Height=0.039inch, Length=0.126inch, Manufacturer URL=http://www.ndk.com/en/, Mount=SurfaceMount, Mounting Technology=SurfaceMount, Number of Pins=2, Packaging=TapeandReel, RoHSCompliant=True, Width=0.098inch
X2: library part CMP-2000-05035-1, "Low Profile Crystal, 32.768 KHz, -40 to 85 degC, 2-Pin SMD, RoHS, Tape and Reel", Case Height=0.6mm, Case Length=2mm, Case Width=1.2mm, Frequency=32.768kHz, Frequency Stability=20PPM, Load Capacitance=12.5pF, Manufacturer=ABRACON, Operating Temperature Range=-40Cto+85C, Package / Case=2-SMD, Package Description="2-Pin Surface Mounted Device, Body 2 x 1.2 mm, Height 0.6 mm", Package Reference=ABS06, Brand=ABRACON, Datasheet URL=http://www.mouser.com/ds/2/3/ABS06-10798.pdf, Datasheet Version=Sep-15, Dimensions=1.2mmWx2mmLx0.6mmH, ESR=90kOhms, Factory Pack Quantity=3000, Manufacturer URL=http://www.abracon.com/, Mounting Style=SMD/SMT, Packaging=Reel, Product Category=Crystals, RoHS=Details, Series=ABS06, Termination Style=SMD/SMT, Tolerance=20PPM, Type=LowProfileCrystal
X3: library part CMP-0454-00001-2, "Crystal, 26 MHz, 8 pF, for OA / AV / Short-range Wireless, -10 to 75 degC, 2.0 x 1.6 x 0.45 mm SMD", Load Capacitance="8 pF", Manufacturer=NDK, Nominal Frequency="26 MHz", Operating Temperature="-10 to 75 degC", PartNumber=NX2016SA-26MHZ-EXS00A-CS06025, Storage temperature range="-40 to 85 degC", ComponentLink1Description="Manufacturer URL", ComponentLink1URL=https://www.ndk.com, ComponentLink2Description=Datasheet, ComponentLink2URL=http://www.ndk.com/images/products/catalog/c_NX2016SA-STD-CZS-1_e.pdf, ComponentLink3Description="Package Specification", ComponentLink3URL=http://www.ndk.com/images/products/catalog/c_NX2016SA-STD-CZS-1_e.pdf, Level of drive="10 uW (Max. 200 uW)", Mounting Technology="Surface Mount", Overtone Order=Fundamental, PackageDescription="4-Pin Hand Drawn, Body 2x1.6mm", PackageReference=NX2016SA-26MHZ-EXS00A-CS06025-4

## Via types
v1: diameter 0.385, hole 0.254, Top Layer to Bottom Layer, 122 vias
v2: diameter 0.4, hole 0.254, Top Layer to Bottom Layer, 75 vias
v3: diameter 0.5, hole 0.2, Top Layer to Bottom Layer, 9 vias
v4: diameter 0.385, hole 0.3, Top Layer to Bottom Layer, 1 vias
v5: diameter 0.3, hole 0.254, Top Layer to Bottom Layer, 1 vias

## Nets (pads, with @x,y where several pads share a name; then routed paths per layer and width w, separated by ;. In a path a pad name is that pad's centre, name@x,y a point inside that pad or via, vN(x,y) a via of type N, cw(c..) or ccw(c..) an arc to the next point about the centre after c; other vN are vias at no path point)
3.3v: 3.3v.1 C2.2 C3.2 C4.2 C5.2 C6.2 R3.2 R7.1 R8.1 U1.1 U1.9 U1.24 U1.36 U1.48 U2.2 U2.4 | length 72
  Top Layer w0.16: 3.3v.1@3.44,16.62 4.4,16.62 4.49,16.53 4.49,16.19 4.965,15.715 5.955,15.715 ; U2.4@21.08,8.3 20.513,7.733 20.513,5.727 20.885,5.355 22.897,5.355 23.169,5.628 24.091,5.628 24.248,5.47 24.351,5.47 24.557,5.47 24.66,5.47 24.82,5.63 25.42,5.63 R8.1@25.88,5.17 ; R7.1@25.79,9.19 25.99,9.19 26.98,10.18 26.99,10.17 v1(26.99,10.16) ; v2(28.08,8.78) 28.33,9.03 U1.9@29.8,9.03 ; v1(28.16,12) 28.134,12.026 28.134,13.745 27.76,14.119 27.76,15.18 28,15.42 28.96,15.42 ; v1(31.19,15.527) 31.19,14.42 U1.48@31.15,14.38 U1.1@29.8,13.03 29.28,13.55 29.28,15.1 28.96,15.42 ; U1.24@36.65,5.5 U1.24@36.65,6.18 ; U1.36@38,13.03 37.63,13.03 37.055,13.605 37.055,14.396 37.23,14.571 37.23,15.24 36.808,15.662 32.899,15.662 32.293,16.268 31.498,16.268 31.497,16.269 30.518,16.269 30.517,16.268 29.91,16.268 29.91,15.558 29.772,15.42 28.96,15.42
  Top Layer w0.2: C5.2@8.5,14.53 9.69,14.53 10.03,14.19 10.19,14.35 11.14,14.35 C3.2@11.33,14.16
  Top Layer w0.254: C5.2@8.5,14.53 7.14,14.53 5.955,15.715 6.979,16.739 14.061,16.739 14.4,16.4 C6.2@14.4,16.01 ; R3.2@12.22,5.05 13.13,5.96 13.13,7.81 13.73,8.41 ; C2.2@12.24,8.41 13.73,8.41 ; U2.2@15.28,8.3 15.17,8.41 13.73,8.41 ; U2.4@21.08,8.3 21.96,9.18 R7.1@25.79,9.18 ; R8.1@25.863,5.153 R8.1@25.88,5.17
  Bottom Layer w0.16: v1(26.99,10.16) 26.99,10.19 27.06,10.26 27.55,10.26 ; v2(28.08,8.78) 27.95,8.78 27.79,8.94 27.79,10.02 27.077,10.732 27.077,11.596 27.682,12.201 28.131,12.201 28.16,12.171 v1(28.16,12) ; v1(31.19,15.527) v1@31.197,15.52
3.3v_MCU: C15.2 C16.2 C17.2 J6.1 P2.4 P2.17 P2.18 P2.19 P2.20 R20.1 R21.2 R22.1 R25.2 SW2.2 U3.1 U3.9 U3.24 U3.36 U3.48 U4.2 U4.4 U5.1 U5.3 U5.4 U5.11 U5.17 U5.29 U5.30 U6.8 | length 151.2
  Top Layer w0.16: v2(12.21,14.24) 12.21,13.37 12.47,13.11 v2(12.74,13.11) ; v2(16.02,4.71) 16.02,4.88 16.06,4.92 v2(22.59,4.92) ; v1(22.64,11.84) 22.64,11.92 23.15,12.43 v1(23.15,13.66) ; v2(22.99,6.06) 23,6.05 v2(24.28,6.05) 24.37,6.05 v2@24.38,6.06 ; v1(26.87,12.06) 26.87,13.08 26.93,13.14 26.91,13.16 v1(26.91,13.19) ; v1(33.61,7.58) 33.629,7.58 34.417,8.368 34.838,8.368 35.042,8.572 35.042,9.6 34.19,10.452 32.483,10.452 32.31,10.625 32.31,12.12 32.55,12.36 v1(34.64,12.36) ; v1(37.85,3.5) 37.85,2.45 38.63,1.67 39.546,1.67 40.246,2.37 v1(40.4,2.37) ; v1(41.64,7.19) 41.64,7.02 41.954,6.706 43.51,6.706 43.46,6.656 43.496,6.656 43.49,6.663 v1(43.49,6.67) ; v1(46.02,7.36) 46.02,7.28 46.04,7.26 46.14,7.36 46.48,7.02 46.48,6.56 47.23,5.81 v1(47.39,5.81) ; v1(47.75,3.89) 47.75,4.66 v1@47.89,4.8 ; P2.18@49.43,2.95 P2.19@51.97,2.95 P2.20@54.29,2.95 ; v1@52.125,10.475 52.125,11.386 52.19,11.451 v1(52.19,12.61) 52,12.8 52,14.025 SW2.2@53.47,15.495 SW2.2@52.925,15.495 ; 52.323,9.397 52.438,9.282 52.438,5.109 52.68,4.867 52.68,4.56 P2.20@54.29,2.95 ; P2.20@54.51,2.95 P2.20@54.29,2.95
  Bottom Layer w0.16: U4.4@11.55,5.82 11.92,6.19 14.79,6.19 16.02,4.96 v2(16.02,4.71) ; v2(22.59,4.92) 22.59,5.26 22.99,5.66 v2(22.99,6.06) 22.99,7.13 23.362,7.502 23.983,7.502 U3.1@23.985,7.5 24.009,7.524 24.854,7.524 25.684,8.354 25.684,10.886 25.07,11.5 U3.9@23.985,11.5 22.98,11.5 v1(22.64,11.84) ; v1(23.15,13.66) 23.47,13.66 23.828,13.382 24.997,13.382 26.031,12.348 26.917,12.348 ; v2@24.475,6.06 24.465,6.05 v2(24.28,6.05) 24.38,6.05 24.405,6.025 U3.48@25.46,6.025 ; v1(26.87,12.06) 26.87,12.275 26.93,12.335 26.917,12.348 ; v1(26.91,13.19) 27.256,13.19 27.35,13.284 30.504,13.284 30.96,13.74 U3.24@30.96,14.475 ; 29.654,9.666 29.29,10.03 29.29,12.02 28.665,12.645 27.593,12.645 27.296,12.348 26.917,12.348 ; 29.654,9.666 31.478,7.842 31.82,7.5 U3.36@32.435,7.5 33.25,7.5 33.33,7.58 v1(33.61,7.58) 33.708,7.482 33.708,4.388 36.848,4.388 36.85,4.39 37.74,3.5 v1(37.85,3.5) ; v1@34.64,12.395 v1(34.64,12.36) 34.795,12.36 U6.8@35.31,12.875 ; 40.4,2.597 40.82,3.017 40.82,3.429 41.022,3.631 41.022,4.952 41.87,5.8 R22.1@41.87,6.02 41.9,6.05 41.64,6.31 v1(41.64,7.19) ; v1@43.52,6.71 43.46,6.65 43.48,6.67 v1(43.49,6.67) 43.49,4.97 43.813,4.647 45.975,4.647 45.98,4.642 46.096,4.642 47.24,5.786 47.24,5.8 47.23,5.81 v1(47.39,5.81) ; v1(46.02,7.36) 46.02,7.35 46,7.33 46,8.24 U5.17@46.165,8.405 ; P2.17@46.89,2.95 46.89,3.53 46.56,3.53 46.92,3.89 v1(47.75,3.89) ; v1(47.85,4.96) 47.85,5.176 47.203,5.823 48.323,5.823 48.55,6.05 ; U5.11@49.39,7.68 49.39,6.42 49.02,6.05 48.55,6.05 ; C17.2@50.52,14.73 50.11,14.73 49.92,14.54 49.92,14.24 48.89,13.21 U5.29@48.89,12.63 U5.30@49.39,12.63 49.39,13.268 49.963,13.841 50.154,14.032 50.7,14.032 50.985,13.747 50.985,13.425 51.8,12.61 v1(52.19,12.61) 52.19,12.24 51.855,11.905 U5.1@51.115,11.905 ; U5.3@51.115,10.905 U5.4@51.115,10.405 51.13,10.42 51.885,10.42 v1(52.125,10.66) 52.125,9.595 v1(52.18,9.54) ; P2.20@54.51,2.95 54.51,4.76 ; J6.1@54.71,7.05 54.71,5.63 R21.2@54.64,5.56 54.51,5.43 54.51,4.76 ; 48.55,6.05 48.55,4.92 48.95,4.52 52.132,4.52 52.372,4.76 54.51,4.76
  Bottom Layer w0.254: C16.2@11.32,15.44 C15.2@12.76,15.44 ; U4.4@11.55,5.82 13.87,3.5 P2.4@13.87,2.95 ; U4.2@11.55,11.62 11.55,12.702 11.977,13.129 12.721,13.129 v2(12.74,13.11) ; v2(12.21,14.24) 12.21,14.89 C15.2@12.76,15.44 ; C15.2@12.8,15.48 C15.2@12.76,15.44
+5: C1.2 C7.2 C14.2 D1.1 P2.1 U2.3 U4.3 | length 29.5
  Top Layer w0.254: v2(14.68,4.77) 15.28,5.37 15.28,6 17.95,6 18.66,6.71 18.66,13.07 D1.1@19.17,13.58 ; C7.2@18.09,15.93 18.09,14.65 18.98,13.76 D1.1@18.98,13.39 D1.1@19.17,13.58 ; C1.2@20.88,13.58 D1.1@19.17,13.58
  Bottom Layer w0.254: P2.1@6.25,2.95 7.524,1.676 14.666,1.676 15.1,2.11 15.1,3.83 14.68,4.25 v2(14.68,4.77)
GND: C1.1 C2.1 C3.1 C4.1 C5.1 C6.1 C7.1 C8.1 C9.1 C10.1 C11.1 C12.1 C13.1 C14.1 C15.1 C16.1 C17.1 C18.1 C19.1 D2.2 GND.1 P2.2 P2.3 P3.1 P3.2 PWR.2 R5.1 R6.1 R9.2 R10.1 R17.2 R18.1 R19.1 R25.1 ST.2 SW1.2 U1.8 U1.23 U1.35 U1.47 U2.1 U3.8 U3.23 U3.35 U3.47 U4.1 U5.33 U6.4 USB.5 X3.2 X3.4 | length 234.3
  Top Layer w0.16: GND.1@3.55,18.56 3.92,18.19 P3.1@6.25,18.19 P3.2@8.79,18.19 ; v1(9.23,13.37) 9.65,13.37 10.5,12.52 10.5,11.21 ; C7.1@16.69,15.93 16.69,16.65 16.77,16.73 18.418,16.73 20.168,14.98 C1.1@20.88,14.98 21.21,14.98 22.14,15.91 C9.1@23.38,15.91 C9.1@23.581,15.91 ; v1(17.17,12.18) 16.81,11.82 v1(16.27,11.82) 16.27,11.11 15.76,10.6 16.35,10.6 17.01,9.94 17.01,7.28 16.91,7.18 14.03,7.18 13.56,6.71 13.56,4.97 14.278,4.252 22.282,4.252 v1(22.4,4.37) ; C1.1@20.88,14.77 21.66,13.99 C8.1@21.66,12.39 21.66,12.212 22.342,11.53 22.342,11.32 22.542,11.12 v2(22.61,11.12) ; C9.1@23.683,15.808 25.041,14.45 R5.1@25.52,14.45 25.692,14.45 26.362,13.78 27.09,13.78 27.413,13.457 v1@27.413,11.527 ; v1(24.862,5.068) v1@24.962,5.068 ; v1(28.38,9.53) U1.8@29.8,9.53 31.15,9.53 v1(31.21,9.47) ; R6.1@29.93,14.39 29.93,15.002 30.491,15.563 v1@30.491,15.641 ; v1@30.491,15.777 v1(30.491,15.812) 30.491,15.781 30.668,15.957 31.368,15.957 31.369,15.956 31.65,15.956 U1.47@31.65,14.38 31.65,13.44 32.305,12.785 32.844,12.785 32.845,12.786 34.995,12.786 35.245,12.536 35.245,12.346 36.051,11.54 ; v1(34.25,7.575) 34.995,7.575 35,7.57 35.12,7.69 ; U1.23@36.19,7.08 35.808,7.462 35.348,7.462 35.12,7.69 ; R10.1@43.66,15.95 43.86,16.15 44.779,16.15 46.274,14.655 46.274,13.091 ST.2@46.36,13.005 ; R10.1@43.66,16.07 43.66,16.56 43.4,16.82 41.872,16.82 41.082,16.03 41.082,15.117 40.911,14.946 40.911,14.936 40.114,14.139 40.104,14.139 40.109,14.134 40.045,14.07 40.045,13.2 39.705,12.86 39.43,12.86 39.15,12.58 38.05,12.58 U1.35@38,12.53 37.023,12.53 36.718,12.225 36.718,12.038 36.22,11.54 36.051,11.54 ; v1@43.83,11.14 v1(43.94,11.14) ; v1@43.94,11.244 v1(43.94,11.14) ; v1(45.11,13.94) 44.92,13.94 44.85,13.87 44.58,13.6 44.58,11.573 44.147,11.14 v1(43.94,11.14) ; R25.1@46.48,5.26 46.8,4.94 47.25,4.94 47.425,5.115 47.425,5.244 47.815,5.634 47.815,5.986 47.566,6.235 47.414,6.235 47.2,6.449 47.2,7.749 47.324,7.873 47.324,8.839 47.545,9.06 v3(47.55,9.06) ; v3(47.54,11.255) 47.55,11.245 v3(47.55,10.16) v3(47.55,9.06) ; v1(48.61,14.08) 48.61,14.365 SW1.2@49.68,15.435 ; v3(49.74,10.155) v3(49.74,9.055) ; v3(49.74,11.255) v3(48.64,11.255) v3(48.64,10.155) v3(48.64,9.055) ; SW1.2@50.27,16.025 SW1.2@49.68,15.435 ; v1(51.42,6.75) 51.42,6.92 49.74,8.6 v3(49.74,9.055) ; v1(51.44,13.65) 51.44,13.89 51.335,13.995 50.215,13.995 49.68,14.53 SW1.2@49.68,15.435 ; v1(53.33,13.76) 53.302,13.732 53.302,12.888 v1(54.25,11.94) ; 35.12,7.69 35.12,8.209 35.354,8.443 35.354,9.73 34.32,10.764 32.887,10.764 32.622,11.029 32.622,11.572 33.098,12.048 34.271,12.048 34.779,11.54 36.051,11.54 ; v3(47.55,9.06) 48.635,9.06 v3(48.64,9.055) ; v3(48.64,9.055) v3(49.74,9.055)
  Top Layer w0.2: PWR.2@3.33,2.575 v2(4.35,3.595) ; USB.5@6.625,9.26 8.594,9.26 ; v2(8.594,8.584) 8.594,9.26 ; C5.1@8.67,15.77 11.79,15.77 ; D2.2@9.57,11.21 10.5,11.21 10.84,10.87 C2.1@10.84,8.82 ; C2.1@10.84,8.41 9.444,8.41 8.594,9.26
  Top Layer w0.254: v2(5.54,16.52) 5.54,17.48 P3.1@6.25,18.19 ; v2(7.43,15.6) 7.6,15.77 C5.1@8.67,15.77 ; C2.1@10.84,8.41 C2.1@10.84,8.82 ; 11.79,15.77 12.03,16.01 C6.1@13,16.01 13,15.45 13.4,15.05 15.24,15.05 16.12,15.93 C7.1@16.69,15.93 ; C1.1@20.88,14.77 C1.1@20.88,14.98 20.88,15.78 21.29,16.19 21.22,16.26 v2(21.22,16.265) ; C10.1@25.82,7.78 25.82,6.5 R9.2@25.85,6.47
  Bottom Layer w0.16: v2(7.43,15.6) 7.43,14.91 8.97,13.37 v1(9.23,13.37) 9.23,13.44 9.351,13.561 14.649,13.561 16.27,11.94 v1(16.27,11.82) ; v1(17.17,12.18) 17.36,12.18 C11.1@17.69,11.85 ; v1(22.4,4.37) 22.4,4.431 22.391,4.44 22.789,4.44 22.981,4.632 23.701,4.632 24.137,5.068 v1(24.862,5.068) 25.472,5.068 25.65,4.89 25.96,4.89 U3.47@25.96,6.025 ; v2(22.61,11.12) 22.61,11.09 22.7,11 U3.8@23.985,11 ; v1(27.55,11.4) 27.55,11.39 28.262,10.678 28.262,9.648 v1(28.38,9.53) ; U3.23@30.46,14.475 30.46,15.61 30.491,15.641 v1(30.491,15.812) v1@30.491,15.777 ; v1(31.21,9.47) 31.208,8.572 31.78,8 U3.35@32.435,8 32.445,8.01 33.788,8.01 34.223,7.575 v1(34.25,7.575) 34.925,7.575 34.93,7.57 34.94,7.58 35.65,6.87 R17.2@35.65,6.33 ; U6.4@42.51,9.065 42.605,9.16 43.374,9.16 43.374,10.986 43.786,10.986 v1(43.94,11.14) v1@43.83,11.14 ; v1(44.23,16.17) 44.23,16.07 44.48,15.82 44.475,15.815 C19.1@45.46,14.83 45.46,14.39 45.11,14.04 v1(45.11,13.94) ; X3.2@47.27,14.83 47.485,15.045 47.485,14.605 47.479,14.599 47.999,14.08 v1(48.61,14.08) ; X3.4@48.835,16.095 51.035,16.095 51.06,16.12 C18.1@51.81,16.12 ; R19.1@49.31,5.39 50.2,6.28 50.76,6.28 52.172,7.692 53.756,7.692 53.78,7.668 55.206,7.668 55.61,8.072 55.61,11.43 55.105,11.935 55.11,11.94 v1(54.25,11.94) 53.95,11.94 53.51,11.5 53.51,10.84 R18.1@53.25,10.58 ; v1(51.44,13.65) 51.92,13.65 52.544,13.026 53.136,13.026 53.33,13.22 v1(53.33,13.76) ; v2@56.22,7.92 v2(56.26,7.88)
  Bottom Layer w0.254: v2(4.35,3.595) 6.485,5.73 7.23,5.73 ; v2(5.54,16.52) 6.51,16.52 v2(7.43,15.6) ; U4.1@9.25,11.62 9.25,9.24 v2(8.594,8.584) 8.594,7.094 7.23,5.73 ; C16.1@9.92,15.44 9.92,16.44 10.19,16.71 13.85,16.71 14.4,16.16 C15.1@14.4,15.48 C14.1@15.84,15.48 ; P2.3@11.33,2.95 P2.2@8.79,2.95 8.79,4.17 7.23,5.73 ; C11.1@17.69,11.85 17.69,9.71 17.86,9.54 C12.1@17.86,9.32 ; v2(21.22,16.265) 21.255,16.265 C13.1@22,15.52
  other v2: 56.27,1.83 56.27,2.63 56.27,3.49 56.24,4.31 56.2,5.14 56.21,6.04 56.2,6.96 56.26,8.83 56.22,9.7 56.22,10.42 56.22,11.29 56.19,12.16 56.04,14.69 56.07,15.57 55.21,16.08 56.08,16.59 55.17,16.93 56.08,17.48 56.08,18.45 56.08,19.25